# EAGLE board bridge (EAGLE 7.5.0)
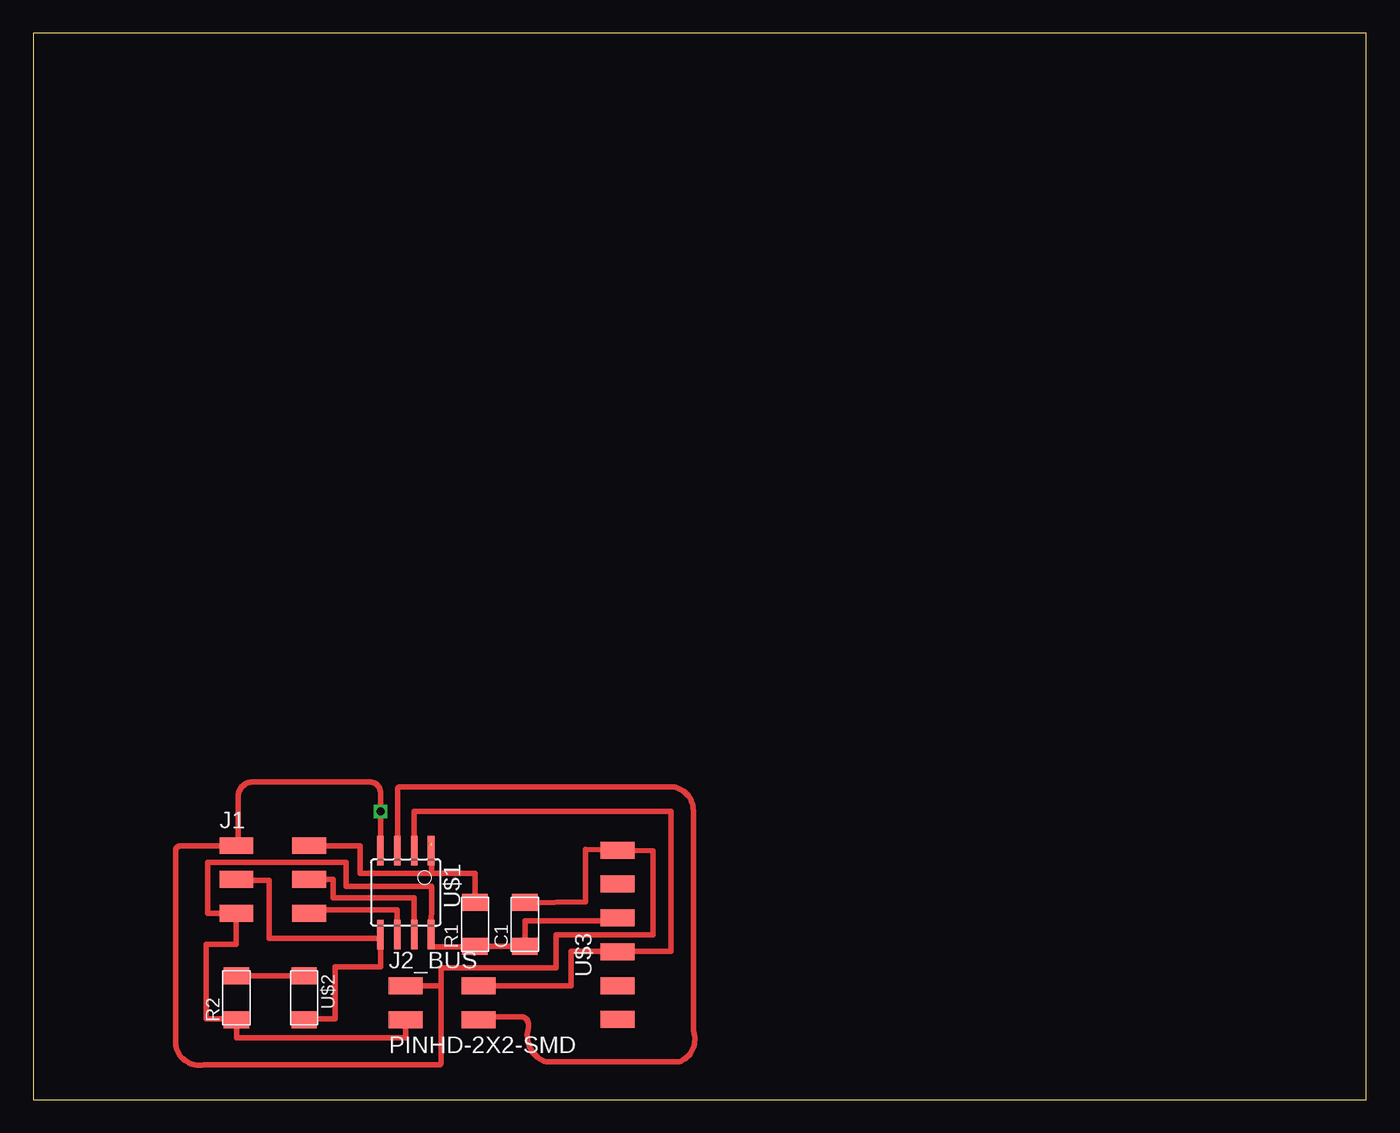
[diagram p0: board, top side]

Size 100 x 80 mm. Coordinates in mm from the lower left corner, seen from the top.
Outline: 0,0 100,0 100,80 0,80 0,0
Copper layers (1*16): Top 0.035mm / dielectric 1.5mm / Bottom 0.035mm
Design rules "default": minimum track width 10mil, minimum drill 24mil, track to track 8mil, track to pad 8mil, pad to pad 8mil, via to via 8mil, smd to smd 8mil, copper to edge 40mil, drill to drill 8mil, minimum pad ring 10mil, minimum via ring 8mil, stop-mask expansion 4mil, vias tented up to drill 0mil, thermal gap 10mil

## Footprints (pad centres in the part's own frame; a part is rotated, then mirrored left to right if it is on the bottom)
C1206FAB = smd 1.27 x 1.905: 1 -1.651,0; 2 1.651,0
2X03SMD = smd 2.54 x 1.27: 1 -2.54,2.54; 2 2.92,2.54; 3 -2.54,0; 4 2.92,0; 5 -2.54,-2.54; 6 2.92,-2.54
2X02SMD = smd 2.54 x 1.27: 1 -2.54,1.27; 2 2.92,1.27; 3 -2.54,-1.27; 4 2.92,-1.27
R1206FAB = smd 1.27 x 1.905: 1 -1.651,0; 2 1.651,0
SOIC8 = smd 0.5 x 2.2: 1 -1.905,-3.154; 2 -0.645,-3.154; 3 0.625,-3.154; 4 1.895,-3.154; 5 1.905,3.154; 6 0.635,3.154; 7 -0.635,3.154; 8 -1.905,3.154
LED1206FAB = smd 1.27 x 1.905: 1 -1.651,0; 2 1.651,0
1X06SMD = smd 2.54 x 1.27: 1 0,6.35; 2 0,3.81; 3 0,1.27; 4 0,-1.27; 5 0,-3.81; 6 0,-6.35

## Placement (x,y rotation side)
C1  1uf  [C1206FAB]  36.87,13.15 90 top
J1  ISP  [2X03SMD]  17.78,16.51 0 top
J2_BUS  PINHD-2X2-SMD  [2X02SMD]  30.48,7.26 0 top
R1  10k  [R1206FAB]  33.13,13.13 90 top
R2  1k  [R1206FAB]  15.24,7.62 90 top
U$1  ATTINY45SI  [SOIC8]  27.94,15.53 180 top
U$2  LEDFAB1206  [LED1206FAB]  20.32,7.62 270 top
U$3  FTDI-SMD-HEADER  [1X06SMD]  43.83,12.36 0 top

## Library data of the parts
C1 J1 J2_BUS R1 R2 U$1-U$3 = fab

## Nets
A: R2.2 U$2.1
C: J1.3 U$1.5 U$2.2
GND: C1.2 J1.1 J2_BUS.1 U$1.4
MISO: J1.6 U$1.6
RST: J1.2 R1.2 U$1.1
RX: J2_BUS.4 U$1.3
SCK: J1.4 U$1.7
TX: J2_BUS.2 U$1.2
VCC: C1.1 J1.5 J2_BUS.3 R1.1 R2.1 U$1.8

## Tracks (layer width: path | path; a pad name or v marks a point on that pad's centre or on a via)
A
  Top 0.406: U$2.1 R2.2
C
  Top 0.406: U$2.2 20.32,6.04 22.66,6.04 22.64,9.96 26.05,9.96 U$1.5 26.04,12.09 17.69,12.09 17.69,16.45 15.3,16.45 J1.3
GND  (via drill 0.6)
  Top 0.406: U$1.4 v26.05,21.6 26.05,23.02 arc90 25.25,23.82 16.45,23.82 arc90 15.38,22.76 15.38,19.19 arc-90 J1.1 15.24,19.02 11.02,19.02 arc90 10.67,18.67 10.67,4.09 arc90 12.8,2.59 30.43,2.59 arc90 30.58,2.74 30.58,8.53 | J2_BUS.1 30.58,8.53 | 30.58,8.53 30.58,9.87 39.2,9.87 39.2,12.36 46.51,12.36 46.49,18.67 41.44,18.76 41.43,14.85 36.88,14.76 C1.2
MISO
  Top 0.406: U$1.6 27.29,14.22 20.7,14.22 J1.6
RST  (1 unrouted)
  Top 0.406: U$1.1 29.87,18.69 29.87,19.29 | 29.87,19.05 29.87,16.98 | J1.2 20.7,19.02 24.54,19.02 24.54,16.98 29.87,16.98 | 29.87,16.98 33.13,16.98 R1.2
RX
  Top 0.406: U$1.3 27.32,23.23 arc-90 27.56,23.47 47.74,23.47 arc-90 49.52,21.69 49.52,5.16 arc-90 48.45,2.82 38.49,2.82 arc-90 37.16,5.42 37.16,5.6 arc90 36.54,6.22 33.63,6.22 arc90 J2_BUS.4
SCK
  Top 0.406: J1.4 22.49,16.51 22.49,15.11 28.57,15.11 U$1.7
TX
  Top 0.406: 28.54,18.69 U$1.2 28.59,21.6 47.84,21.6 47.84,11.11 40.36,11.11 40.36,8.53 J2_BUS.2
VCC
  Top 0.406: 32.8,11.48 R1.1 33.13,11.49 C1.1 36.89,11.48 36.89,13.42 44.09,13.42 | 29.86,15.29 U$1.8 29.87,12.38 29.87,11.47 32.8,11.47 32.8,11.48 | 29.86,15.29 29.87,16 23.47,16 23.47,17.78 13.07,17.78 13.07,13.96 15.24,13.96 J1.5 15.2,13.97 15.2,11.65 12.98,11.65 12.98,6.04 15.24,6.04 R2.1 15.24,4.64 27.94,4.64 J2_BUS.3 | 32.8,11.48 32.8,11.49 | 29.86,15.65 29.86,15.29